# EAGLE board uBeep_PSU (EAGLE 9.4.2)

Size 160 x 100 mm. Coordinates in mm from the lower left corner, seen from the top.
Outline: 0,0 160,0 160,100 0,100 0,0
Copper layers (1*16): Top 0.035mm / dielectric 1.5mm / Bottom 0.035mm
Design rules "default": minimum track width 6mil, minimum drill 0.35mm, track to track 6mil, track to pad 6mil, pad to pad 6mil, via to via 6mil, smd to smd 6mil, copper to edge 40mil, drill to drill 6mil, minimum pad ring 10mil, minimum via ring 8mil, stop-mask expansion 4mil, vias tented up to drill 0mil, thermal gap 10mil

## Footprints (pad centres in the part's own frame; a part is rotated, then mirrored left to right if it is on the bottom)
703W-00/52 = drill 1.8: E 0.015,0; N 7.015,0 | drill 1.8 square: L -6.985,0 | hole 3.5: 19.765,-7.3; -19.735,-7.3
RAC10-DK/277 = drill 1.5 square: P$1 -22.86,10.16 | drill 1.5: P$2 -22.86,-10.16; P$3 22.86,-10.16; P$4 22.86,0; P$5 22.86,10.16

## Placement (x,y rotation side)
J1  703W-00/52  [703W-00/52]  -40.64,-6.35 0 top  (outside the outline)
U1  RAC10-12DK/277  [RAC10-DK/277]  -39.37,13.97 0 top  (outside the outline)

## Library data of the parts
J1 U1 = roomready

## Nets
+12V: U1.P$5
-12V: U1.P$3
AC_E: J1.E
AC_L: U1.P$2
AC_N: J1.N U1.P$1
GND: U1.P$4

## Tracks (layer width: path | path; a pad name or v marks a point on that pad's centre or on a via)
AC_N  (1 unrouted)